# EAGLE board Semáforo Inteligente (EAGLE 9.7.0)

Size 209.31 x 59.69 mm. Coordinates in mm from the lower left corner, seen from the top.
Outline: 0,0 209.31,0 209.31,59.69 0,59.69 0,0
Copper layers (1*16): Top 0.035mm / dielectric 1.5mm / Bottom 0.035mm
Design rules "default": minimum track width 6mil, minimum drill 0.35mm, track to track 6mil, track to pad 6mil, pad to pad 6mil, via to via 6mil, smd to smd 6mil, copper to edge 40mil, drill to drill 6mil, minimum pad ring 10mil, minimum via ring 8mil, stop-mask expansion 4mil, vias tented up to drill 0mil, thermal gap 10mil

## Footprints (pad centres in the part's own frame; a part is rotated, then mirrored left to right if it is on the bottom)
LEDRD254W60D565H860B = drill 0.981 pad 1.581: 1 -1.27,0; 2 1.27,0
LEDRD254W60D565H860B_Y = drill 0.981 pad 1.581: 1 -1.27,0; 2 1.27,0
LEDRD254W60D565H860B_G = drill 0.981 pad 1.581: 1 -1.27,0; 2 1.27,0
7SEG-13 = drill 0.813 long: 1 -5.08,-7.62; 2 -2.54,-7.62; 3 0,-7.62; 4 2.54,-7.62; 5 5.08,-7.62; 6 5.08,7.62; 7 2.54,7.62; 8 0,7.62; 9 -2.54,7.62; 10 -5.08,7.62
PIEZO = drill 1 pad 1.6: 1 -3.5,0; 2 3.5,0
RESAD1016W63L850D250B = drill 0.83 pad 1.43: 1 -5.08,0; 2 5.08,0
SWITCH-MOMENTARY-PTH-6.5MM = drill 1.016 pad 1.88: 1 -3.251,2.261; 2 3.251,2.261; 3 -3.251,-2.261; 4 3.251,-2.261
ARDUINO-UNO-R3-SHIELD = drill 1.016 pad 1.88: 3.3V 24.13,-2.54; 5V 24.13,0; A0 24.13,12.7; A1 24.13,15.24; A2 24.13,17.78; A3 24.13,20.32; A4 24.13,22.86; A5 24.13,25.4; AREF -24.13,-13.97; D2 -24.13,20.32; D3 -24.13,17.78; D4 -24.13,15.24; D5 -24.13,12.7; D6 -24.13,10.16; D7 -24.13,7.62; D8 -24.13,3.81; D9 -24.13,1.27; D10 -24.13,-1.27; D11 -24.13,-3.81; D12 -24.13,-6.35; D13 -24.13,-8.89; GND@0 24.13,2.54; GND@1 24.13,5.08; GND@2 -24.13,-11.43; IOREF 24.13,-7.62; NC 24.13,-10.16; RES 24.13,-5.08; RX -24.13,25.4; SCL -24.13,-19.05; SDA -24.13,-16.51; TX -24.13,22.86; VIN 24.13,7.62

## Placement (x,y rotation side)
D1  RED  [LEDRD254W60D565H860B]  141.64,20.8 180 top
D2  YELLOW  [LEDRD254W60D565H860B_Y]  149.26,20.8 180 top
D3  GREEN  [LEDRD254W60D565H860B_G]  156.88,20.8 180 top
D4  RED  [LEDRD254W60D565H860B]  144.18,36.04 180 top
D5  GREEN  [LEDRD254W60D565H860B_G]  154.34,36.04 180 top
DIGIT3  7SEG-CK  [7SEG-13]  179.63,16.89 0 top
PIEZO1  PIEZO  [PIEZO]  195.73,44.68 90 top
R1  100  [RESAD1016W63L850D250B]  142.91,48.74 90 top
R2  100  [RESAD1016W63L850D250B]  153.07,48.74 90 top
R3  100  [RESAD1016W63L850D250B]  155.61,13.18 90 top
R4  330  [RESAD1016W63L850D250B]  94.65,28.42 90 top
R5  100  [RESAD1016W63L850D250B]  147.99,13.18 90 top
R6  100  [RESAD1016W63L850D250B]  140.37,13.18 90 top
R7  1k  [RESAD1016W63L850D250B]  135.29,28.42 90 top
R8  330  [RESAD1016W63L850D250B]  99.73,28.42 90 top
R9  330  [RESAD1016W63L850D250B]  89.57,28.42 90 top
R10  330  [RESAD1016W63L850D250B]  104.81,28.42 90 top
R11  330  [RESAD1016W63L850D250B]  109.89,28.42 90 top
R12  330  [RESAD1016W63L850D250B]  114.97,28.42 90 top
R13  330  [RESAD1016W63L850D250B]  120.05,28.42 90 top
R14  10000  [RESAD1016W63L850D250B]  163.23,13.18 90 top
S1  SWITCH_MOMENTARY  [SWITCH-MOMENTARY-PTH-6.5MM]  132.75,37.31 90 top
U1  ARDUINO-UNO-R3-SHIELD  [ARDUINO-UNO-R3-SHIELD]  47.88,29.84 270 top

## Library data of the parts
D1 D4 = Tinkercad; CATEGORY: Opto-Electronic; SUB-CATEGORY: LED; VALUE: LED_RED
D2 = Tinkercad; CATEGORY: Opto-Electronic; SUB-CATEGORY: LED; VALUE: LED_YELLOW
D3 D5 = Tinkercad; CATEGORY: Opto-Electronic; SUB-CATEGORY: LED; VALUE: LED_GREEN
DIGIT3 = Tinkercad; CATEGORY: Opto-Electronic; SUB-CATEGORY: Display; TYPE: 7-Segment
PIEZO1 R1-R14 S1 U1 = Tinkercad

## Nets
D1_C: D1.2 R6.2
D2_C: D2.2 R5.2
D3_C: D3.2 R3.2
D4_C: D4.2 R1.1
D5_C: D5.2 R2.1
DIGIT3_A: DIGIT3.7 R9.1
DIGIT3_B: DIGIT3.6 R4.1
DIGIT3_C: DIGIT3.4 R8.1
DIGIT3_D: DIGIT3.2 R10.1
DIGIT3_E: DIGIT3.1 R11.1
DIGIT3_F: DIGIT3.9 R12.1
DIGIT3_G: DIGIT3.10 R13.1
U1_5V: S1.1 S1.2 U1.5V
U1_A0: R13.2 U1.A0
U1_A1: PIEZO1.1 U1.A1
U1_D2: D1.1 U1.D2
U1_D3: D2.1 U1.D3
U1_D4: D3.1 U1.D4
U1_D5: R7.2 S1.3 S1.4 U1.D5
U1_D6: D4.1 U1.D6
U1_D7: D5.1 U1.D7
U1_D8: R9.2 U1.D8
U1_D9: R4.2 U1.D9
U1_D10: R8.2 U1.D10
U1_D11: R10.2 U1.D11
U1_D12: R11.2 U1.D12
U1_D13: R12.2 U1.D13
U1_GND: DIGIT3.8 PIEZO1.2 R1.2 R2.2 R3.1 R5.1 R6.1 R7.1 R14.1 U1.GND@0 U1.GND@1 U1.GND@2

## Tracks (layer width: path | path; a pad name or v marks a point on that pad's centre or on a via)
D1_C  (1 unrouted)
D2_C  (1 unrouted)
D3_C  (1 unrouted)
D4_C  (1 unrouted)
D5_C  (1 unrouted)
DIGIT3_A  (1 unrouted)
DIGIT3_B  (1 unrouted)
DIGIT3_C  (1 unrouted)
DIGIT3_D  (1 unrouted)
DIGIT3_E  (1 unrouted)
DIGIT3_F  (1 unrouted)
DIGIT3_G  (1 unrouted)
U1_5V  (2 unrouted)
U1_A0  (1 unrouted)
U1_A1  (1 unrouted)
U1_D2  (1 unrouted)
U1_D3  (1 unrouted)
U1_D4  (1 unrouted)
U1_D5  (3 unrouted)
U1_D6  (1 unrouted)
U1_D7  (1 unrouted)
U1_D8  (1 unrouted)
U1_D9  (1 unrouted)
U1_D10  (1 unrouted)
U1_D11  (1 unrouted)
U1_D12  (1 unrouted)
U1_D13  (1 unrouted)
U1_GND  (11 unrouted)